# EAGLE board Sensor Board (EAGLE 8.2.0)
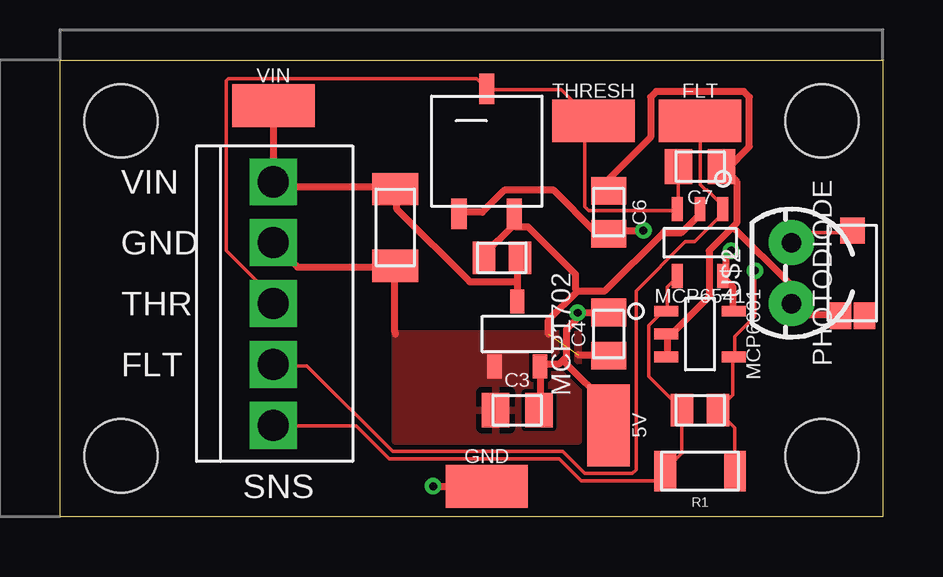
[diagram p0: board, top side]
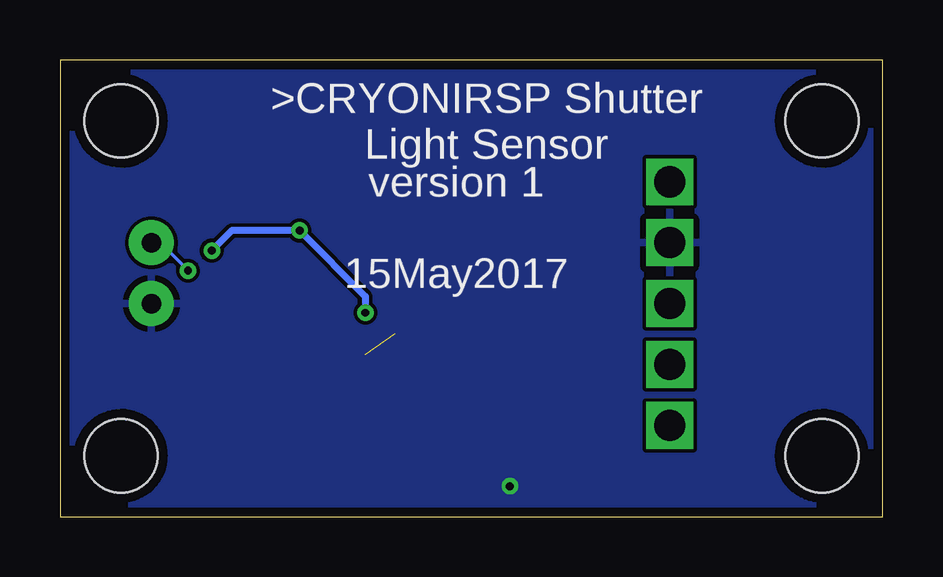
[diagram p1: board, bottom side, seen from below]

Size 34.29 x 19.05 mm. Coordinates in mm from the lower left corner, seen from the top.
Outline: 0,0 0,19.05 34.29,19.05 34.29,0 0,0
Copper layers (1*16): Top 0.0356mm / dielectric 1.5011mm / Bottom 0.0356mm
Design rules "oshpark-2layer": minimum track width 6mil, minimum drill 13mil, track to track 6mil, track to pad 6mil, pad to pad 6mil, via to via 6mil, smd to smd 6mil, copper to edge 15mil, drill to drill 6mil, minimum pad ring 7mil, minimum via ring 7mil, stop-mask expansion 2.5mil, vias tented up to drill 0mil, thermal gap 10mil
Net classes: 1 power: width 0.3 mm

## Footprints (pad centres in the part's own frame; a part is rotated, then mirrored left to right if it is on the bottom)
5015 = smd 3.429 x 1.778: 1 0,0
0805_C = smd 0.95 x 1.35: 1 -0.75,0; 2 0.75,0
0805_B = smd 1.15 x 1.45: 1 -0.9,0; 2 0.9,0
1206_A = smd 1.35 x 1.9: 1 -1.6,0; 2 1.6,0
SOT23A(CB) = smd 0.6 x 1: 1 -0.95,-1.35; 2 0.95,-1.35; 3 0,1.35
SOT23(OT) = smd 1 x 0.45: 1 -1.4,0.95; 2 -1.4,0; 3 -1.4,-0.95; 4 1.4,-0.95; 5 1.4,0.95
VEMD6160X01 = smd 1.09 x 0.88: A1 -1.774,0.5; X -1.775,-0.5 | smd 1.09 x 1.02: K 1.775,0
1206 = smd 0.9 x 1.7: 1 -1.45,0; 2 1.45,0
3224G = smd 1.27 x 0.635: 1 2.6,1.15; 2 -2.6,0; 3 2.6,-1.15
OSTVN05 = drill 1.3 square: 1 -5.08,0; 2 -2.54,0; 3 0,0; 4 2.54,0; 5 5.08,0
LTR-516AD = drill 0.813 pad 1.88: A -1.27,0; K 1.27,0
STAND-OFF-TIGHT = hole 3.048: 0,0

## Placement (x,y rotation side)
5V  TEST_POINT5015  [5015]  22.86,3.81 270 top
C1  22p  [0805_C]  26.67,4.44 180 top
C2  1u  [0805_C]  18.42,10.79 0 top
C3  1u  [0805_B]  19.05,4.44 0 top
C4  1u  [0805_B]  22.86,7.62 90 top
C5  10u  [1206_A]  13.97,12.06 90 top
C6  1u  [0805_B]  22.86,12.7 270 top
C7  1u  [0805_B]  26.67,14.6 180 top
FLT  TEST_POINT5015  [5015]  26.67,16.51 0 top
GND  TEST_POINT5015  [5015]  17.78,1.27 0 top
MCP1702  MCP1702  [SOT23A(CB)]  19.05,7.62 0 top
MCP6001  MCP6001MCP6001  [SOT23(OT)]  26.67,7.62 0 top
MCP6541  MCP6541  [SOT23(OT)]  26.67,11.43 270 top
PHOTODIODE  VEMD6160X01  [VEMD6160X01]  33.02,10.16 90 top
R1  10M  [1206]  26.67,1.9 180 top
THRESH  TEST_POINT5015  [5015]  22.22,16.51 0 top
TRIMPOT3224G  POTENTIOMETER  [3224G]  17.78,15.24 270 top
U$1  M05OSTVN05  [OSTVN05]  8.89,8.89 270 top
U$2  PHOTODIODE  [LTR-516AD]  30.48,10.16 90 top
U$3  [STAND-OFF-TIGHT]  31.75,16.51 0 top
U$4  [STAND-OFF-TIGHT]  31.75,2.54 0 top
U$5  [STAND-OFF-TIGHT]  2.54,2.54 0 top
U$6  [STAND-OFF-TIGHT]  2.54,16.51 0 top
VIN  TEST_POINT5015  [5015]  8.89,17.14 0 top

## Library data of the parts
5V FLT GND THRESH VIN = Keystone
C1-C7 = KEMET
MCP1702 MCP6541 = MICROCHIP
MCP6001 = MICROCHIP; DIGIKEY: MCP3008T-I/SLCT-ND
PHOTODIODE = VISHAY
R1 = Stackpole
TRIMPOT3224G = Bourns
U$1 = OST
U$2 = LITEON
U$3-U$6 = SparkFun-Electromechanical

## Nets
5V [power]: 5V.1 C3.2 C4.2 C6.2 MCP1702.2 MCP6001.5 MCP6541.5 TRIMPOT3224G.3
FLUX_FAULT: FLT.1 MCP6541.1 U$1.4
GND [power]: C2.1 C3.1 C4.1 C5.1 C6.1 C7.1 GND.1 MCP1702.1 MCP6001.2 MCP6001.3 MCP6541.2 PHOTODIODE.A1 TRIMPOT3224G.1 U$1.2 U$2.A
PHOTODIODE: C1.1 MCP6001.4 PHOTODIODE.K R1.1 U$2.K
SENSOR_OUT: C1.2 MCP6001.1 MCP6541.4 R1.2 U$1.5
THRESHOLD: C7.2 MCP6541.3 THRESH.1 TRIMPOT3224G.2 U$1.3
VIN [power]: C2.2 C5.2 MCP1702.3 U$1.1 VIN.1

## Tracks (layer width: path | path; a pad name or v marks a point on that pad's centre or on a via)
5V  (via drill 0.33)
  Top 0.3: C3.2 19.96,4.47 20.04,4.55 20.04,6.22 MCP1702.2 20.04,6.37 20.8,6.37 20.96,6.53 | 21.64,8.36 21.11,7.82 21.11,6.68 20.96,6.53 | 21.64,8.36 21.79,8.51 22.86,8.51 C4.2 | 5V.1 22.86,4.62 20.96,6.53 | MCP6001.5 28.04,8.58 28.04,9.58 27.66,9.96 MCP6541.5 27.74,10.11 27.74,10.87 v27.96,11.1 | TRIMPOT3224G.3 16.69,12.7 17.6,12.7 18.52,13.61 20.57,13.61 22.33,11.86 22.86,11.86 C6.2 22.94,11.94 v24.31,11.94 | v21.57,8.51 21.57,8.43 21.64,8.36
  Bottom 0.3: v27.96,11.1 27.13,11.94 v24.31,11.94 21.57,9.19 v21.57,8.51
FLUX_FAULT
  Top 0.152: FLT.1 26.67,13.84 26.9,13.61 26.97,13.61 27.58,13.01 27.58,12.85 MCP6541.1 27.58,12.78 27.58,12.62 26.44,11.48 26.06,11.48 24,9.42 24,1.96 23.85,1.8 21.87,1.8 20.96,2.72 13.87,2.72 10.29,6.3 8.91,6.3 U$1.4
GND  (via drill 0.33)  (1 unrouted)
  Top 0.3: C2.1 17.68,10.95 18.9,12.17 18.9,12.62 TRIMPOT3224G.1 18.97,12.09 19.51,12.09 21.49,10.11 21.49,9.5 21.57,9.42 | MCP6541.2 26.67,12.62 25.91,11.86 25.15,11.86 22.71,9.42 21.57,9.42 | 21.57,9.42 20.35,8.2 20.35,7.62 | 21.59,6.76 22.86,6.76 C4.1 | 13.97,7.62 13.94,7.75 13.94,10.41 C5.1 13.79,10.41 9.91,10.41 U$1.2 | PHOTODIODE.A1 32.46,8.43 30.94,8.43 U$2.A 30.4,8.97 30.4,9.73 28.04,12.09 | MCP6001.3 25.3,6.68 25.3,7.6 MCP6001.2 25.37,7.67 25.53,7.67 27.05,9.19 27.05,11.1 28.04,12.09 | 28.04,12.09 28.19,12.24 28.19,13.99 27.58,14.6 C7.1 27.81,14.53 28.73,15.44 28.73,17.5 28.5,17.73 24.84,17.73 24.61,17.5 24.61,15.82 22.86,14.07 C6.1 | v15.54,1.27 GND.1
  pour Bottom: 0,21.59 35.56,21.59 35.56,-1.27 0,-1.27
  pour Top: 13.97,7.62 21.59,7.62 21.59,3.17 13.97,3.17
PHOTODIODE  (via drill 0.33)
  Top 0.152: R1.1 28.12,1.96 28.12,3.71 27.43,4.39 C1.1 27.43,4.47 28.04,5.08 28.04,6.6 MCP6001.4 28.12,6.68 28.12,7.52 28.96,8.36 v28.96,10.26 | PHOTODIODE.K 33,11.86 30.86,11.86 30.48,11.48 U$2.K
  Bottom 0.152: v28.96,10.26 30.1,11.4 30.48,11.4 U$2.K
SENSOR_OUT
  Top 0.152: MCP6541.4 25.68,9.96 25.3,9.58 25.3,8.58 MCP6001.1 25.22,8.51 25.07,8.51 24.54,7.98 24.54,5.84 25.91,4.47 C1.2 25.91,4.39 25.91,2.64 25.22,1.96 R1.2 25.15,1.88 24.76,1.5 21.72,1.5 20.8,2.41 13.72,2.41 12.34,3.78 8.91,3.78 U$1.5
THRESHOLD
  Top 0.152: C7.2 25.76,14.6 25.76,12.85 MCP6541.3 25.68,12.78 22.02,12.78 21.87,12.93 21.87,16.28 22.1,16.51 THRESH.1 22.17,16.51 20.88,17.8 17.83,17.8 TRIMPOT3224G.2 17.75,17.88 17.37,18.26 7.01,18.26 6.93,18.19 6.93,11.1 8.84,9.19 8.84,8.89 U$1.3
VIN
  Top 0.3: 19.05,9.8 19.05,10.72 19.13,10.79 C2.2 | 19.05,9.8 MCP1702.3 | 19.05,9.8 17.07,9.8 14.02,12.85 14.02,13.61 C5.2 13.87,13.77 9.14,13.77 8.99,13.92 U$1.1 8.91,13.99 8.91,17.12 VIN.1

## Text on the board
bPlace: >CRYONIRSP Shutter / Light Sensor | version 1 | 15May2017
tNames: VIN | GND | THR | FLT | SNS